# EAGLE board OSPLv2_4_5 (EAGLE 6.6.0)
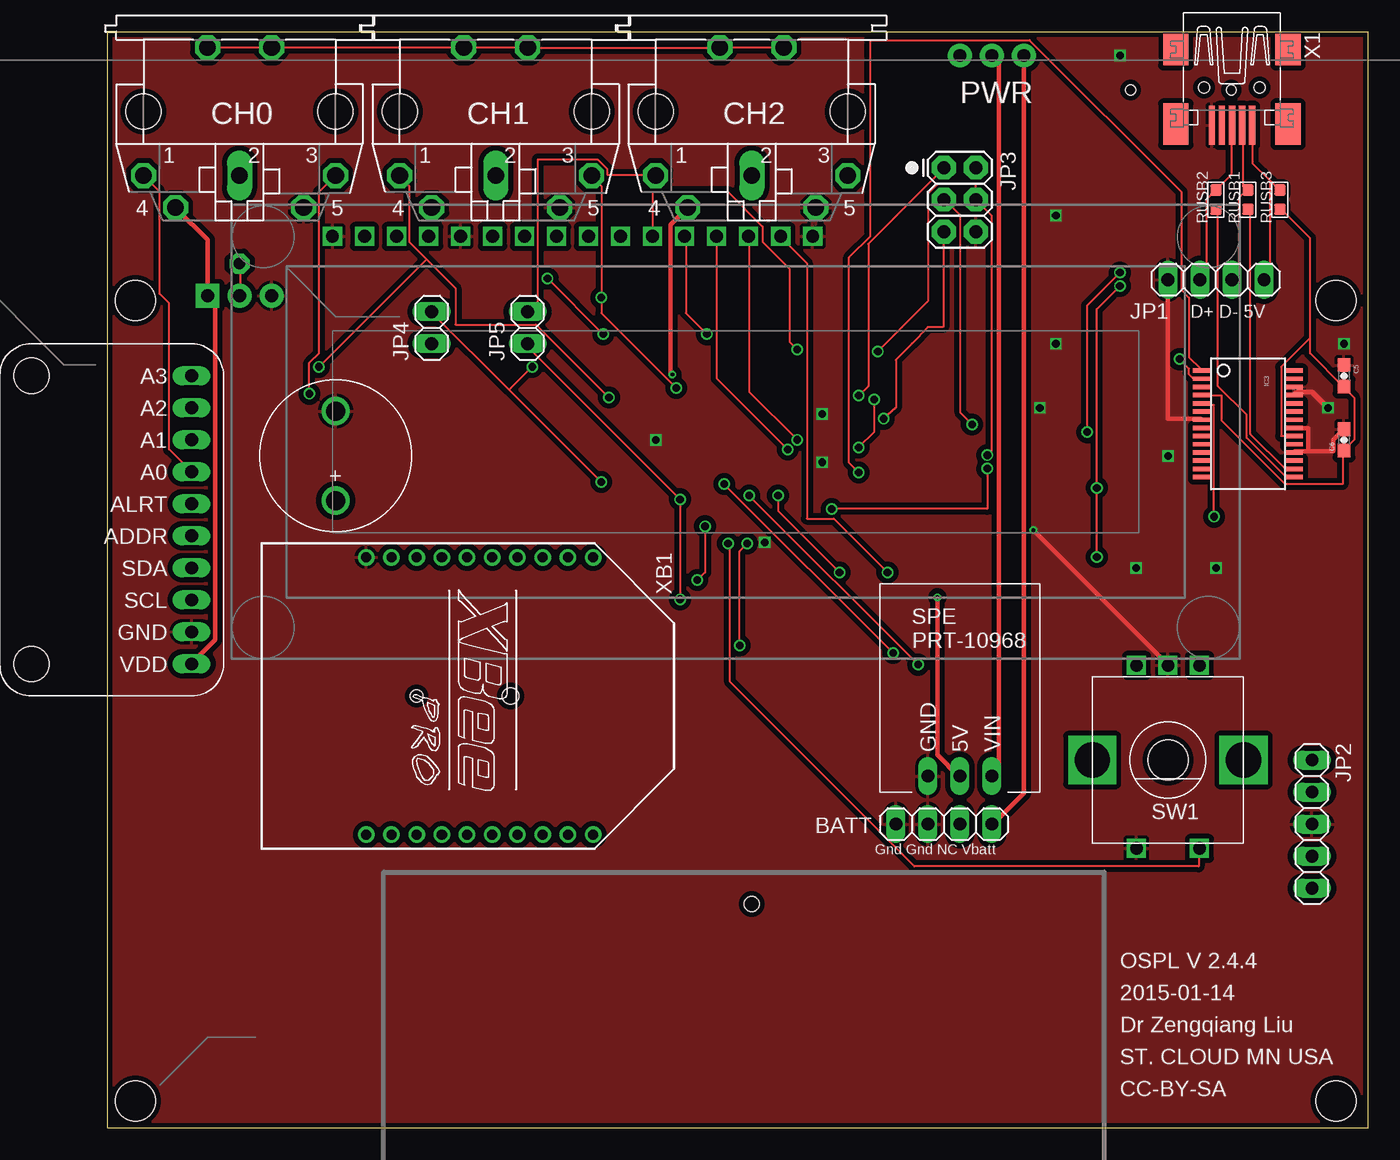
[diagram p0: board, top side]
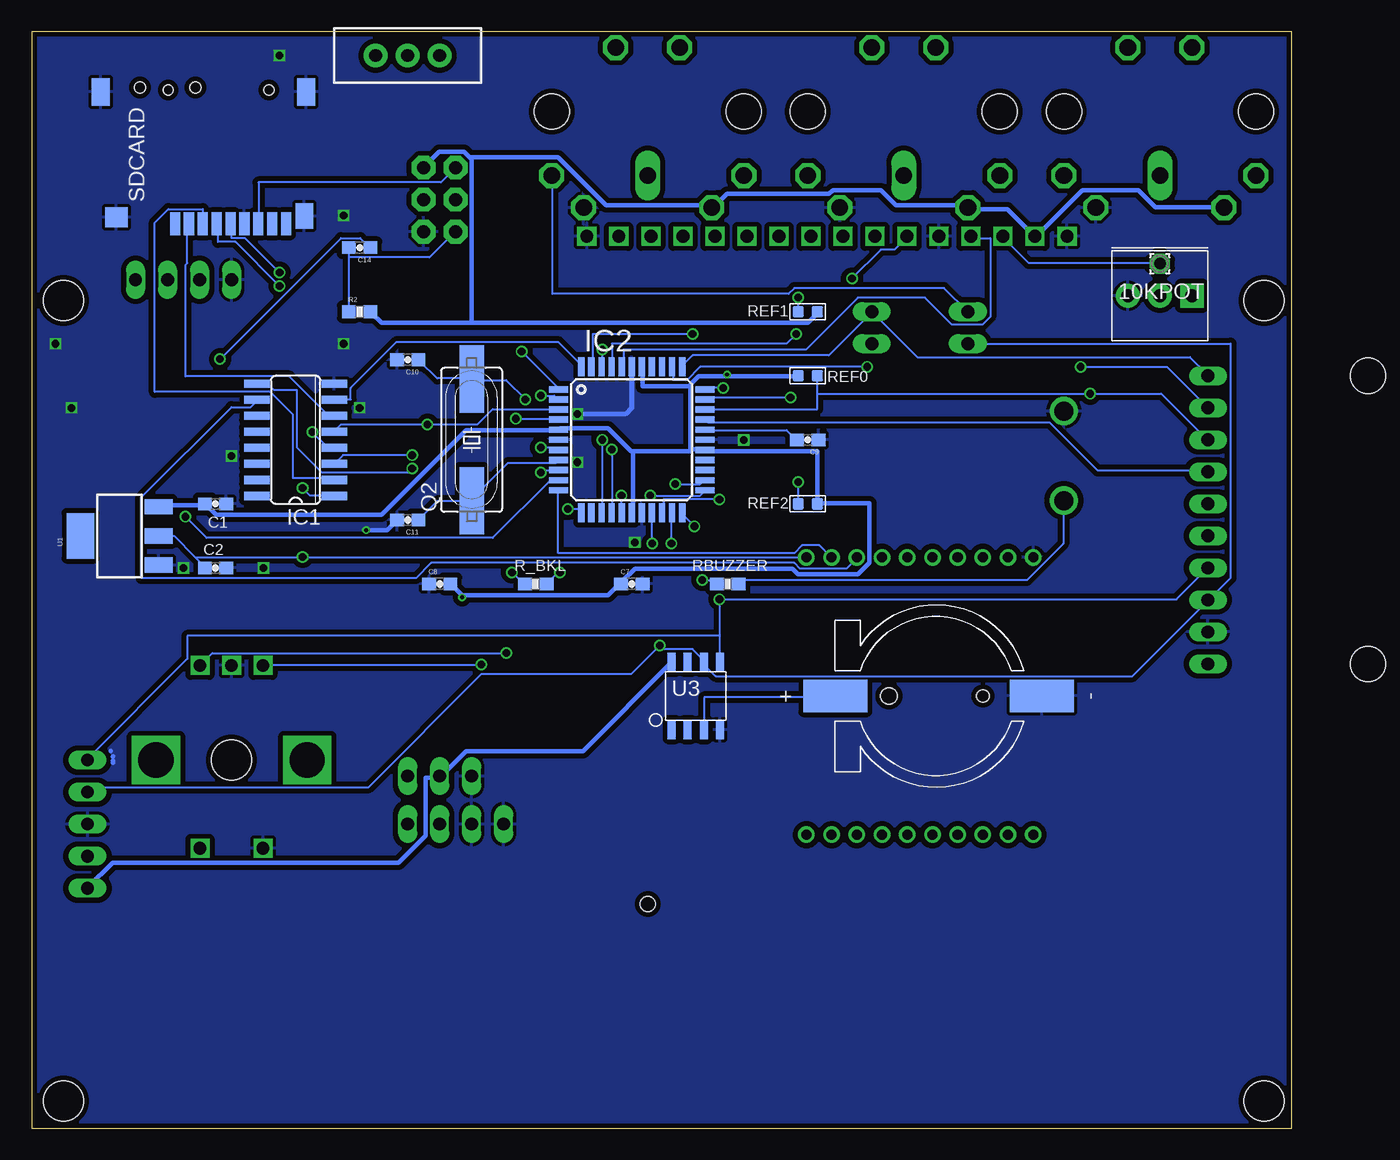
[diagram p1: board, bottom side, seen from below]

Size 100 x 87 mm. Coordinates in mm from the lower left corner, seen from the top.
Outline: 0,0 0,87 100,87 100,0 0,0
Copper layers (1*16): Top 0.035mm / dielectric 1.5mm / Bottom 0.035mm
Design rules "Fusion_eagle_rule_v1.1": minimum track width 6mil, minimum drill 12mil, track to track 6mil, track to pad 6mil, pad to pad 6mil, via to via 6mil, smd to smd 0mil, copper to edge 10mil, drill to drill 10mil, minimum pad ring 10mil, minimum via ring 6mil, stop-mask expansion 2mil, vias tented up to drill 100mil, thermal gap 10mil
Net classes: 0 default: width 0.152 mm, drill 0.61 mm, clearance 0.152 mm; 1 power: width 0.356 mm
Holes 3.2 mm at 84.12,29.21
Holes 1.2 mm at 51.1,17.78

## Footprints (pad centres in the part's own frame; a part is rotated, then mirrored left to right if it is on the bottom)
1,6/0,9 = drill 0.914 pad 1.6 octagon: 1 0,0
HARWIN12MMHOLDER = smd 2.54 x 5.08: PAD3V3 0,-7.975; PADGND 0,8.425 | hole 1: 0,3.725 | hole 1.3: 0,-3.725
1X04 = drill 1.016 long: 1 -3.81,0; 2 -1.27,0; 3 1.27,0; 4 3.81,0
BUZZER-6P5-7P5 = drill 1.5: P$1 0,3.55; P$2 0,-3.55
0603-CAP = smd 1.1 x 1: 1 -0.85,0; 2 0.85,0
MAB5SH = drill 1.321 octagon: 1 7.62,5.08; 3 -7.62,5.08; 4 5.08,7.62; 5 -5.08,7.62; PE -2.54,-5.08; PE@ 2.54,-5.08 | drill 1.321 long: 2 0,5.08 | hole 2.794: 7.62,0; -7.62,0
SO16 = smd 0.66 x 2.032: 1 -4.445,-3.073; 2 -3.175,-3.073; 3 -1.905,-3.073; 4 -0.635,-3.073; 5 0.635,-3.073; 6 1.905,-3.073; 7 3.175,-3.073; 8 4.445,-3.073; 9 4.445,3.073; 10 3.175,3.073; 11 1.905,3.073; 12 0.635,3.073; 13 -0.635,3.073; 14 -1.905,3.073; 15 -3.175,3.073; 16 -4.445,3.073
TQFP44 = smd 1.5 x 0.5: 1 -5.8,4; 2 -5.8,3.2; 3 -5.8,2.4; 4 -5.8,1.6; 5 -5.8,0.8; 6 -5.8,0; 7 -5.8,-0.8; 8 -5.8,-1.6; 9 -5.8,-2.4; 10 -5.8,-3.2; 11 -5.8,-4; 23 5.8,-4; 24 5.8,-3.2; 25 5.8,-2.4; 26 5.8,-1.6; 27 5.8,-0.8; 28 5.8,0; 29 5.8,0.8; 30 5.8,1.6; 31 5.8,2.4; 32 5.8,3.2; 33 5.8,4 | smd 0.5 x 1.5: 12 -4,-5.8; 13 -3.2,-5.8; 14 -2.4,-5.8; 15 -1.6,-5.8; 16 -0.8,-5.8; 17 0,-5.8; 18 0.8,-5.8; 19 1.6,-5.8; 20 2.4,-5.8; 21 3.2,-5.8; 22 4,-5.8; 34 4,5.8; 35 3.2,5.8; 36 2.4,5.8; 37 1.6,5.8; 38 0.8,5.8; 39 0,5.8; 40 -0.8,5.8; 41 -1.6,5.8; 42 -2.4,5.8; 43 -3.2,5.8; 44 -4,5.8
SSOP28DB = smd 0.348 x 1.397: 1 -4.225,-3.656; 2 -3.575,-3.656; 3 -2.925,-3.656; 4 -2.275,-3.656; 5 -1.625,-3.656; 6 -0.975,-3.656; 7 -0.325,-3.656; 8 0.325,-3.656; 9 0.975,-3.656; 10 1.625,-3.656; 11 2.275,-3.656; 12 2.925,-3.656; 13 3.575,-3.656; 14 4.225,-3.656; 15 4.225,3.656; 16 3.575,3.656; 17 2.925,3.656; 18 2.275,3.656; 19 1.625,3.656; 20 0.975,3.656; 21 0.325,3.656; 22 -0.325,3.656; 23 -0.975,3.656; 24 -1.625,3.656; 25 -2.275,3.656; 26 -2.925,3.656; 27 -3.575,3.656; 28 -4.225,3.656
1X05 = drill 1.016 long: 1 -5.08,0; 2 -2.54,0; 3 0,0; 4 2.54,0; 5 5.08,0
2X3 = drill 1.016 pad 1.88 octagon: 1 0,0; 2 0,2.54; 3 2.54,0; 4 2.54,2.54; 5 5.08,0; 6 5.08,2.54
1X02 = drill 1.016 long: 1 -1.27,0; 2 1.27,0
LCD-16X2-0HOLES-NO-FRAME = drill 1.016 square: A 3.56,15.5; DB0 -16.76,15.5; DB1 -14.22,15.5; DB2 -11.68,15.5; DB3 -9.14,15.5; DB4 -6.6,15.5; DB5 -4.06,15.5; DB6 -1.52,15.5; DB7 1.02,15.5; E -19.3,15.5; K 6.1,15.5; R/W -21.84,15.5; RS -24.38,15.5; VDD -29.46,15.5; VO -26.92,15.5; VSS -32,15.5
3362U = drill 1.016 pad 1.88 square: P$1 0,2.54 | drill 1.016 pad 1.88: P$2 2.54,2.54; P$3 5.08,2.54
SWITCH-SPDT = drill 1.016 pad 1.88: 1 0,2.54; 2 0,0; 3 0,-2.54
HC49UP = smd 5.334 x 1.93: 1 -4.826,0; 2 4.826,0
0603-RES = smd 1.1 x 1: 1 -0.85,0; 2 0.85,0
R0603 = smd 0.889 x 0.889: 1 -0.762,0; 2 0.762,0
MICROSD_PP = smd 1.8 x 0.8: 1 0,3.85; 2 0,2.75; 3 0,1.65; 4 0,0.55; 5 0,-0.55; 6 0,-1.65; 7 0,-2.75; 8 0,-3.85; 9 0,-4.95 | smd 1.6 x 1.8: GND@1 0.5,8.5 | smd 2.2 x 1.4: GND@2 10.45,9.75; GND@4 10.45,-6.55 | smd 2 x 1.4: GND@3 0.6,-6.4 | hole 0.8: 10.6,4.4; 10.6,-3.6
SPE-DC-DC-BOOST = drill 1.016 long: GND -2.54,-6.35; VIN 2.54,-6.35; VOUT 0,-6.35
SWITCH-ALPS_ALPS_EC12E_SW = drill 1 square: A -2.5,-7.5; B 2.5,-7.5; C 0,-7.5; D -2.5,7; E 2.5,7 | drill 2.8 square: GND1 -6,0; GND2 6,0
SOT223 = smd 1.219 x 2.235: 1 -2.311,-3.099; 2 0,-3.099; 3 2.311,-3.099 | smd 3.6 x 2.2: 4 0,3.099
SOP08 = smd 0.635 x 1.524: 1 -1.905,-2.667; 2 -0.635,-2.667; 3 0.635,-2.667; 4 1.905,-2.667; 5 1.905,2.667; 6 0.635,2.667; 7 -0.635,2.667; 8 -1.905,2.667
BUSHING-AG-54 = hole 3.2: -47.625,-31.75; 47.625,-31.75; -47.625,31.75; 47.625,31.75
ADAFRUIT-ADC = drill 1.016 long: A0 3.81,0; A1 6.35,0; A2 8.89,0; A3 11.43,0; ADDR -1.27,0; ALRT 1.27,0; GND -8.89,0; SCL -6.35,0; SDA -3.81,0; VDD -11.43,0 | hole 2.8: -11.43,12.7; 11.43,12.7
32005-301 = smd 3.1 x 0.5: 1 3,1.6; 2 3,0.8; 3 3,0; 4 3,-0.8; 5 3,-1.6 | smd 2.5 x 2: M1 -3,-4.45; M2 -3,4.45 | smd 3.3 x 2: M3 2.9,4.45; M4 2.9,-4.45 | hole 0.9: 0,2.2; 0,-2.2
XBEE-PRO = drill 0.8 pad 1.27: 1 -11,9; 2 -11,7; 3 -11,5; 4 -11,3; 5 -11,1; 6 -11,-1; 7 -11,-3; 8 -11,-5; 9 -11,-7; 10 -11,-9; 11 11,-9; 12 11,-7; 13 11,-5; 14 11,-3; 15 11,-1; 16 11,1; 17 11,3; 18 11,5; 19 11,7; 20 11,9

## Placement (x,y rotation side)
10KPOT  wiper  [1,6/0,9]  10.46,68.58 180 bottom
BAT1  [HARWIN12MMHOLDER]  28.24,34.29 270 bottom
BATT  [1X04]  66.34,24.13 0 top
BUZZER  DIPMICRO-BUZZER6P5_7P5  [BUZZER-6P5-7P5]  18.08,53.34 180 top
C1  10uF  [0603-CAP]  85.39,49.53 180 bottom
C2  10uF  [0603-CAP]  85.39,44.45 180 bottom
C5  0.1uF  [0603-CAP]  98.09,59.69 270 top
C6  10uF  [0603-CAP]  98.09,54.61 90 top
C7  0.1uF  [0603-CAP]  52.37,43.18 0 bottom
C8  0.1uF  [0603-CAP]  67.61,43.18 0 bottom
C9  0.1uF  [0603-CAP]  38.4,54.61 180 bottom
C10  22pF  [0603-CAP]  70.15,60.96 180 bottom
C11  22pF  [0603-CAP]  70.15,48.26 180 bottom
C14  0.1uF  [0603-CAP]  73.96,69.85 180 bottom
CH0  MAB5SH  [MAB5SH]  10.46,80.65 180 top
CH1  MAB5SH  [MAB5SH]  30.78,80.65 180 top
CH2  MAB5SH  [MAB5SH]  51.1,80.65 180 top
IC1  74HC4050D  [SO16]  79.04,54.61 90 bottom
IC2  ATMEGA1284P-AU  [TQFP44]  52.37,54.61 0 bottom
IC3  FT232RLSSOP  [SSOP28DB]  90.47,55.88 270 top
JP1  USB  [1X04]  87.93,67.31 180 top
JP2  11DOF  [1X05]  95.55,24.13 270 top
JP3  ICSP  [2X3]  66.34,76.2 270 top
JP4  SCL  [1X02]  25.7,63.5 90 top
JP5  SDA  [1X02]  33.32,63.5 90 top
LCD  LCD-HD447804-HOLES4-HOLES  [LCD-16X2-0HOLES-NO-FRAME]  49.83,55.25 0 top
POT1  10K  [3362U]  7.92,68.58 180 bottom
PWR  [SWITCH-SPDT]  70.15,85.09 270 bottom
Q2  [HC49UP]  65.07,54.61 90 bottom
R2  10K  [0603-RES]  73.96,64.77 0 bottom
R_BKL  330  [0603-RES]  59.99,43.18 180 bottom
RBUZZER  330  [0603-RES]  44.75,43.18 180 bottom
REF0  10k  [R0603]  38.4,59.69 0 bottom
REF1  10k  [R0603]  38.4,64.77 180 bottom
REF2  10k  [R0603]  38.4,49.53 180 bottom
RUSB1  22  [R0603]  90.47,73.66 90 top
RUSB2  22  [R0603]  87.93,73.66 90 top
RUSB3  0  [R0603]  93.01,73.66 90 top
SDCARD  MICROSD_PP  [MICROSD_PP]  84.76,71.75 90 bottom
SPEDC-DC  DC-DCBOOSTSPE-DC-DCBOOSTSPE-DC-DC-BOOST  [SPE-DC-DC-BOOST]  67.61,34.29 0 top
SW1  SWITCH-ALPS_EC12E_SW  [SWITCH-ALPS_ALPS_EC12E_SW]  84.12,29.21 180 top
U1  ASM1117-3.3  [SOT223]  93.01,46.99 90 bottom
U3  DS1307_SOP08  [SOP08]  47.29,34.29 0 bottom
U$1  ENCLOSUREAG-54  [BUSHING-AG-54]  49.83,33.91 0 top
U$2  ADAFRUIT-ADCADS11X5ADS11X5  [ADAFRUIT-ADC]  6.65,48.26 90 top
X1  MINI-USB-32005-301  [32005-301]  89.2,82.55 270 top
XB1  XBEE-PRO  [XBEE-PRO]  29.51,34.29 270 top

## Library data of the parts
10KPOT = wirepad
BAT1 BATT BUZZER LCD SPEDC-DC U$1 U$2 = ICs
C1 C2 C5-C11 C14 IC3 JP3 POT1 PWR R2 R_BKL RBUZZER = SparkFun
CH0 CH1 CH2 = con-hirschmann; OC_FARNELL: 809883; OC_NEWARK: unknown
IC1 = 40xx
IC2 = atmel; MPN: ATMEGA644PV-10AU; OC_FARNELL: 1455123; OC_NEWARK: 58M3748
JP1 JP2 JP4 JP5 = pinhead
Q2 = crystal; OC_FARNELL: unknown; OC_NEWARK: unknown
REF0 REF1 REF2 RUSB1-RUSB3 = OPL Eagle Library
SDCARD = DE1594-v2
SW1 = ICs; MPN: EC12E2424407; OC_FARNELL: 1520813; OC_NEWARK: 74M1068
U1 U3 = Itead_IC_110429
X1 = con-cypressindustries; OC_FARNELL: unknown; OC_NEWARK: unknown
XB1 = maxstream; MPN: XBP24-AWI-001; OC_FARNELL: 1337916; OC_NEWARK: 42M2667

## Nets
3V3: C2.2 IC1.1 SDCARD.4 U1.2 XB1.1
A0: CH0.1 IC2.30 U$2.A0
A1: CH0.3 IC2.31 REF0.2 U$2.A1
A2: CH1.1 IC2.32 U$2.A2
A3: CH1.3 IC2.33 REF1.2
A4: CH2.1 IC2.34 JP5.2 U$2.A3
A5: CH2.3 IC2.35 JP4.2 REF2.2
A6: IC2.36
A7: IC2.37
AREF1: C9.2 IC2.29
CS3: IC1.6 SDCARD.2
D4: IC2.40 LCD.RS
D5: IC2.41 LCD.E
D6: IC2.42 LCD.DB4
D7: IC2.43 LCD.DB5
D8: IC2.14 LCD.DB7
D9: IC2.15 LCD.DB6
D10: IC1.7 IC2.44
D24: IC2.21 SW1.D
D25: IC2.22 RBUZZER.2
D26: IC2.23 SW1.B
D27: IC2.24 SW1.A
D28: IC2.25
D29: IC2.26
D30: IC2.13
D31: IC2.16 R_BKL.1
D+: JP1.3 RUSB2.2 X1.3
D-: JP1.2 RUSB1.2 X1.2
DI3: IC1.2 SDCARD.3
DTR: C14.1 IC3.2
GND [power]: BAT1.PADGND BATT.1 BATT.2 BUZZER.P$2 C1.1 C2.1 C5.1 C6.2 C7.2 C8.1 C9.1 C10.2 C11.2 CH0.5 CH1.5 CH2.5 IC1.8 IC2.6 IC2.18 IC2.28 IC2.39 IC3.7 IC3.18 IC3.21 IC3.25 IC3.26 JP1.4 JP2.3 JP3.6 LCD.K LCD.R/W LCD.VSS POT1.P$3 SDCARD.6 SDCARD.GND@1 SDCARD.GND@2 SDCARD.GND@3 SDCARD.GND@4 SPEDC-DC.GND SW1.C SW1.E U1.1 U3.4 U$2.GND X1.5 XB1.10
ID: X1.4
MISO: IC2.2 JP3.1 SDCARD.7
MOSI: IC1.3 IC2.1 JP3.4
N$1: C11.1 IC2.8 Q2.1
N$2: C10.1 IC2.7 Q2.2
N$4: LCD.A R_BKL.2
N$5 [power]: BATT.4 PWR.3
N$6: BAT1.PAD3V3 U3.3
N$7: 10KPOT.1 LCD.VO POT1.P$2
N$13: IC1.11
N$14: IC1.12
N$15: IC1.14
N$23: IC1.15
N$24: BUZZER.P$1 RBUZZER.1
PE: CH0.PE CH0.PE@ CH1.PE CH1.PE@ CH2.PE CH2.PE@
RD+: IC3.15 RUSB2.1
RD-: IC3.16 RUSB1.1
RESET: C14.2 IC2.4 JP3.5 R2.1
RX1: IC2.11 XB1.2
RX3: IC1.10 XB1.3
RX-I: IC2.9 IC3.1
SCK: IC1.5 IC2.3 JP3.3
SCK3: IC1.4 SDCARD.5
SCL: IC2.19 JP2.2 JP4.1 U3.6 U$2.SCL
SDA: IC2.20 JP2.1 JP5.1 U3.5 U$2.SDA
TX1: IC1.9 IC2.12
TX-O: IC2.10 IC3.5
VBUS: JP1.1 RUSB3.2 X1.1
VCC [power]: C1.2 C7.1 C8.2 CH0.4 CH1.4 CH2.4 IC2.5 IC2.17 IC2.27 IC2.38 JP2.5 JP3.2 LCD.VDD POT1.P$1 R2.2 REF0.1 REF1.1 REF2.1 SPEDC-DC.VOUT U1.3 U3.8 U$2.VDD
VIN [power]: PWR.2 SPEDC-DC.VIN
VUSB: C5.2 C6.1 IC3.4 IC3.20 RUSB3.1

## Tracks (layer width: path | path; a pad name or v marks a point on that pad's centre or on a via)
3V3  (via drill 0.61)
  Top 0.152: v80.31,66.8 78.49,64.97 v78.49,50.8 v78.49,45.31
  Bottom 0.152: v80.31,66.8 83.82,70.31 85.19,70.31 85.19,71.68 SDCARD.4 | v78.49,50.8 77.88,50.19 76.05,50.19 IC1.1 | 87.02,45.31 88.7,46.99 U1.2 | 87.02,45.31 86.26,44.55 C2.2 | 87.02,45.31 v78.49,45.31 38.56,45.31 XB1.1
A0
  Top 0.152: U$2.A0 4.88,53.85 4.88,65.43 4.11,66.19 4.11,74.27 2.9,75.49 CH0.1
  Bottom 0.152: IC2.30 46.48,56.13 46.33,55.98 19.2,55.98 15.39,52.17 6.71,52.17 U$2.A0
A1  (via drill 0.61)
  Top 0.152: v16,58.27 16,60.71 16.76,61.47 16.76,74.27 17.98,75.49 CH0.3
  Bottom 0.152: 37.64,58.27 37.64,57.05 46.48,57.05 IC2.31 | 37.64,58.27 REF0.2 | 37.64,58.27 v16,58.27 10.36,58.27 6.71,54.61 U$2.A1
A2  (via drill 0.61)
  Top 0.152: v39.78,57.96 33.98,63.75 27.58,63.75 27.58,66.65 25.3,68.94 | 25.3,68.94 23.93,70.31 23.93,74.73 23.16,75.49 CH1.1 | 25.3,68.94 v16.76,60.4
  Bottom 0.152: v39.78,57.96 46.33,57.96 46.48,57.81 IC2.32 | U$2.A2 9.91,60.4 v16.76,60.4
A3  (via drill 0.61)
  Top 0.152: CH1.3 38.4,75.49 39.17,74.73 v39.17,65.89 39.17,64.67 v45.11,58.73
  Bottom 0.152: v39.17,65.89 REF1.2 | v45.11,58.73 46.48,58.73 IC2.33
A4
  Top 0.152: JP5.2 34.14,65.58 34.14,76.86 38.86,76.86 39.62,76.1 39.62,75.64 43.43,75.64 CH2.1
  Bottom 0.152: IC2.34 48.31,60.55 47.55,61.32 36.73,61.32 33.38,64.67 JP5.2 29.72,61.16 8.08,61.16 6.71,59.79 U$2.A3
A5  (via drill 0.61)
  Top 0.152: 31.85,58.57 25.76,64.67 JP4.2 | 31.85,58.57 v39.17,51.26 | 31.85,58.57 v33.68,60.4
  Bottom 0.152: v39.17,51.26 REF2.2 | v33.68,60.4 46.94,60.4 48.01,59.33 49.07,59.33 49.07,60.4 IC2.35 | JP4.2 27.58,66.65 39.47,66.65 39.93,66.19 58.67,66.19 58.67,75.49 CH2.3
AREF1
  Bottom 0.152: C9.2 39.32,54.61 40.08,55.37 46.48,55.37 IC2.29
CS3
  Bottom 0.152: SDCARD.2 87.63,71.68 87.63,68.63 87.78,68.48 87.78,59.64 79.55,59.64 76.5,56.59 76.05,56.59 IC1.6
D4
  Bottom 0.152: IC2.40 53.03,60.55 53.03,61.77 38.56,61.77 34.44,65.89 29.11,65.89 26.97,63.75 24.54,63.75 23.93,64.36 23.93,70.61 25.45,70.61 LCD.RS
D5  (via drill 0.61)
  Top 0.152: v34.9,67.41 v39.32,62.99
  Bottom 0.152: v39.32,62.99 40.08,62.23 53.95,62.23 53.95,60.55 IC2.41 | v34.9,67.41 32.61,69.7 31.55,69.7 30.63,70.61 LCD.E
D6  (via drill 0.61)
  Top 0.152: v54.71,61.77 54.1,62.38 54.1,68.17 51.97,70.31 51.97,71.53 49.22,74.27 43.28,74.27 43.28,70.76 LCD.DB4
  Bottom 0.152: v54.71,61.77 54.71,60.55 IC2.42
D7  (via drill 0.61)
  Top 0.152: v47.55,62.99 45.87,64.67 45.87,70.61 LCD.DB5
  Bottom 0.152: v47.55,62.99 55.47,62.99 55.47,60.55 IC2.43
D8  (via drill 0.61)
  Top 0.152: v54.71,54.61 50.9,58.42 50.9,70.61 LCD.DB7
  Bottom 0.152: v54.71,54.61 54.71,48.82 IC2.14
D9  (via drill 0.61)
  Top 0.152: v53.95,53.85 48.31,59.49 48.31,70.61 LCD.DB6
  Bottom 0.152: v53.95,53.85 53.95,48.82 IC2.15
D10
  Bottom 0.152: IC2.44 56.39,60.55 58.22,62.38 71.02,62.38 74.68,58.73 74.68,57.81 75.89,57.81 IC1.7
D24  (via drill 0.61)
  Top 0.152: v49.22,46.38 49.38,46.23 49.38,35.41 64.01,20.78 86.56,20.78 86.56,22.15 SW1.D
  Bottom 0.152: v49.22,46.38 49.22,48.67 IC2.21
D25  (via drill 0.61)
  Top 0.152: v46.79,43.48 47.4,44.09 v47.4,47.75
  Bottom 0.152: v46.79,43.48 46.02,43.48 45.72,43.18 RBUZZER.2 | v47.4,47.75 48.31,48.67 IC2.22
D26  (via drill 0.61)
  Top 0.152: v64.31,36.78 v50.9,50.19
  Bottom 0.152: v50.9,50.19 46.94,50.19 46.63,50.5 IC2.23 | v64.31,36.78 81.53,36.78 SW1.B
D27  (via drill 0.61)
  Top 0.152: v62.33,37.69 v48.92,51.11
  Bottom 0.152: v48.92,51.11 46.94,51.11 46.63,51.41 IC2.24 | v62.33,37.69 85.65,37.69 86.56,36.78 SW1.A
D31  (via drill 0.61)
  Top 0.152: v58.06,44.09 53.19,48.97 v53.19,50.19
  Bottom 0.152: v58.06,44.09 58.22,44.09 59.13,43.18 R_BKL.1 | v53.19,50.19 53.19,48.82 IC2.16
D+
  Top 0.152: X1.3 89.15,79.45 89.15,75.64 RUSB2.2 87.17,73.66 87.17,67.87 86.72,67.41 JP1.3
D-
  Top 0.152: 90.37,74.42 90.07,74.73 90.07,79.45 X1.2 | JP1.2 89.76,67.87 89.76,73.81 90.37,74.42 | 90.37,74.42 RUSB1.2
DI3
  Bottom 0.152: SDCARD.3 86.41,71.83 86.41,72.9 89.15,72.9 90.22,71.83 90.22,58.42 81.08,58.42 79.25,56.59 79.25,51.56 76.05,51.56 IC1.2
DTR  (via drill 0.61)
  Top 0.152: v85.04,61.01 85.8,60.25 85.8,59.79 86.11,59.49 86.72,59.49 IC3.2
  Bottom 0.152: v85.04,61.01 75.44,70.61 73.91,70.61 73.15,69.85 C14.1
GND  (via drill 0.3, 0.6)
  Top 0.356: 95.25,53.7 97.23,53.7 97.23,54.61 97.99,55.37 C6.2 | 95.25,53.7 94.18,53.7 IC3.18 | 95.25,53.7 95.25,55.52 94.18,55.52 IC3.21 | JP1.4 84.12,56.29 86.72,56.29 IC3.7 | 56.24,72.9 CH2.5 | 56.24,72.9 | v73.46,47.45 84.12,36.78 SW1.C | C5.1 98.15,60.55 98.22,60.55
  Top 0.406: IC3.25 94.4,58.42 95.55,58.42 v96.82,57.15
  Bottom 0.356: v73.46,47.45 71.78,47.45 71.02,48.21 C11.2 | 93.57,29.01 93.5,29.01 | 93.57,29.16 93.5,29.16 | 93.57,29.46 93.51,29.49 | 93.73,29.92 93.7,29.95
  Bottom 0.406: IC2.39 52.37,57.15 52.88,56.64 56.44,56.64
  other vias: 56.69,56.64 43.48,54.61 56.69,52.83 87.93,44.45 73.96,57.15 75.23,62.23 98.09,62.23 75.23,72.39 80.31,85.09 84.12,53.34 81.58,44.45 52.12,46.48
  pour Bottom (isolate 0.406): -2.24,-1.27 -2.24,88.9 103.57,88.9 103.57,-1.27
  pour Top (isolate 0.406): -0.97,90.17 101.9,90.17 101.9,-3.81 -0.97,-3.81
MISO  (via drill 0.61)
  Top 0.152: v59.59,58.11 60.35,58.88 60.35,70.16 66.29,76.1 JP3.1
  Bottom 0.152: v59.59,58.11 58.52,58.11 58.22,57.81 IC2.2 | JP3.1 67.51,75.03 81.99,75.03 81.99,71.83 SDCARD.7
MOSI  (via drill 0.61)
  Top 0.152: v61.11,61.62 65.07,65.58 65.07,74.12 65.84,74.88 68.88,74.88 JP3.4 70.1,72.44 70.1,53.7 v69.8,53.39
  Bottom 0.152: v61.11,61.62 58.22,58.73 IC2.1 | IC1.3 75.29,53.39 v69.8,53.39
N$1
  Bottom 0.152: C11.1 69.19,48.36 67.82,49.73 65.07,49.73 Q2.1 65.07,49.89 62.18,52.78 58.37,52.78 58.22,52.93 IC2.8
N$2  (via drill 0.61)
  Top 0.152: v59.59,54 60.81,55.22 v60.81,57.81
  Bottom 0.152: C10.1 69.19,60.86 67.82,59.49 65.07,59.49 Q2.2 65.07,59.33 62.33,59.33 v60.81,57.81 | v59.59,54 58.37,54 58.22,53.85 IC2.7
N$4  (via drill 0.61)
  Top 0.152: v61.87,44.09 57.61,48.36 55.47,48.36 55.47,68.63 53.49,70.61 LCD.A
  Bottom 0.152: v61.87,44.09 60.96,43.18 R_BKL.2
N$5
  Top 0.356: PWR.3 72.69,26.57 70.26,24.13 BATT.4
N$6
  Bottom 0.152: U3.3 46.63,31.75 46.63,34.19 36.27,34.19 BAT1.PAD3V3
N$7
  Top 0.152: POT1.P$2 10.52,66.04 10.52,68.48 10KPOT.1
  Bottom 0.152: LCD.VO 22.86,70.61 20.88,68.63 10.52,68.63 10KPOT.1
N$24
  Bottom 0.152: RBUZZER.1 43.89,43.18 43.59,43.48 21.03,43.48 18.14,46.38 18.14,49.73 BUZZER.P$1
PE
  Top 0.152: CH2.PE 53.64,85.7 48.62,85.7 CH2.PE@ 48.46,85.7 33.38,85.7 CH1.PE 33.22,85.7 28.35,85.7 CH1.PE@ 28.19,85.7 13.11,85.7 CH0.PE 12.95,85.7 7.92,85.7 CH0.PE@
RD+
  Top 0.152: RUSB2.1 88.09,72.75 88.09,58.88 90.37,56.59 90.37,54.76 93.42,51.71 94.03,51.71 IC3.15
RD-
  Top 0.152: RUSB1.1 90.53,72.9 90.68,72.75 90.68,55.07 93.42,52.32 94.03,52.32 IC3.16
RESET  (via drill 0.61)
  Top 0.152: v61.57,56.29 62.53,57.15 62.53,60.96 63.8,62.23 65.07,63.55 66.29,63.55 66.29,71.07 JP3.5
  Bottom 0.152: 74.83,69.09 74.83,69.85 C14.2 | 74.83,69.09 74.83,64.82 R2.1 | v61.57,56.29 58.22,56.29 IC2.4 | 74.83,69.09 68.43,69.09 66.45,71.07 JP3.5
RX1
  Bottom 0.152: IC2.11 58.22,50.5 58.22,45.62 39.47,45.62 38.86,46.23 37.49,46.23 36.58,45.31 XB1.2
RX3
  Bottom 0.152: IC1.10 82.14,57.66 82.6,57.2 84.12,57.2 91.29,50.04 91.29,43.64 69.49,43.64 68.27,44.86 39.47,44.86 39.01,44.4 35.36,44.4 34.59,45.16 XB1.3
RX-I  (via drill 0.61)
  Top 0.152: v59.59,52.02 58.83,52.78 58.83,69.09 60.5,70.76 60.5,86.31 73.15,86.31 85.19,74.27 85.19,66.5 85.8,65.89 85.8,61.16 86.72,60.25 IC3.1
  Bottom 0.152: v59.59,52.02 59.44,52.17 58.22,52.17 IC2.9
SCK  (via drill 0.61)
  Top 0.152: v68.58,55.83 67.67,56.74 67.67,72.44 66.45,73.66 JP3.3
  Bottom 0.152: IC2.3 58.22,57.05 63.4,57.05 64.62,55.83 v68.58,55.83 75.44,55.83 75.89,55.37 IC1.5
SCK3  (via drill 0.61)
  Top 0.152: v80.31,67.87 77.72,65.28 v77.72,55.22
  Bottom 0.152: v80.31,67.87 83.06,70.61 84.12,70.61 84.12,71.68 SDCARD.5 | v77.72,55.22 76.5,54 76.05,54 IC1.4
SCL  (via drill 0.61)
  Top 0.152: v50.75,46.38 50.14,45.77 v50.14,38.3
  Bottom 0.152: JP4.1 4.88,62.23 4.88,43.64 6.55,41.96 U$2.SCL 6.71,41.81 12.65,35.87 45.72,35.87 46.79,36.93 U3.6 46.63,37.08 47.55,38 49.83,38 v50.14,38.3 52.43,36.02 64.31,36.02 73.3,27.03 95.25,27.03 95.55,26.72 JP2.2 | v50.75,46.38 50.75,48.67 IC2.19
SDA  (via drill 0.61)
  Top 0.152: JP5.1 33.38,62.23 33.38,61.92 v45.41,49.89 v45.41,41.96
  Bottom 0.152: v45.41,49.89 49.83,49.89 49.83,48.82 IC2.20 | 45.41,39.06 v45.41,41.96 9.14,41.96 U$2.SDA | 45.41,39.06 45.41,37.08 U3.5 | 45.41,39.06 87.63,39.06 87.63,37.24 95.55,29.31 JP2.1
TX1  (via drill 0.61)
  Top 0.152: v57.45,49.12 69.8,49.12 v69.8,52.32
  Bottom 0.152: v57.45,49.12 56.69,49.12 56.39,48.82 IC2.12 | v69.8,52.32 70.1,52.02 76.96,52.02 78.94,54 78.94,58.57 80.77,58.57 81.23,59.03 81.99,59.03 IC1.9
TX-O  (via drill 0.61)
  Top 0.152: v87.78,48.51 87.78,57.35 86.87,57.35 IC3.5
  Bottom 0.152: v87.78,48.51 86.11,46.84 63.4,46.84 58.83,51.41 58.22,51.41 IC2.10
VBUS
  Top 0.152: 92.2,75.18 90.83,76.56 90.83,79.45 X1.1 | 92.2,75.18 92.96,74.42 RUSB3.2 | 92.2,75.18 92.2,67.87 91.74,67.41 JP1.1
VCC  (via drill 0.3)
  Top 0.356: v65.84,42.11 65.84,29.62 67.51,27.94 SPEDC-DC.VOUT | U$2.VDD 6.71,36.93 8.53,38.76 8.53,65.43 POT1.P$1 7.92,70.46 5.49,72.9 CH0.4 | v44.81,59.79 44.65,59.94 44.65,71.68 46.02,73.05 CH2.4
  Bottom 0.356: U3.8 56.24,29.92 65.53,29.92 67.51,27.94 SPEDC-DC.VOUT 67.67,27.79 68.73,27.79 68.73,23.22 70.87,21.08 93.57,21.08 95.55,19.1 JP2.5 | 65.84,42.27 54.25,42.27 53.34,43.18 C7.1 53.19,43.33 52.12,44.4 39.62,44.4 39.17,43.94 34.44,43.94 33.53,44.86 33.53,49.58 37.49,49.58 REF2.1 37.64,53.7 46.48,53.7 IC2.27 46.63,53.85 47.7,53.85 | 65.84,42.27 66.75,43.18 C8.2 | U1.3 89.92,49.43 86.26,49.43 C1.2 86.11,49.43 85.34,48.67 72.24,48.67 65.53,55.37 58.37,55.37 IC2.5 | 51.66,60.4 IC2.38 51.51,60.25 51.51,58.88 47.7,58.88 | 58.22,55.37 IC2.5 | 52.43,48.82 IC2.17 52.27,48.97 52.27,53.7 | 44.81,59.64 47.09,59.64 47.7,59.03 47.7,58.88 | 44.81,59.64 39.17,59.64 REF0.1 | 47.7,53.85 47.7,58.88 | 52.27,53.7 47.7,53.7 47.7,53.85 | IC2.5 58.06,55.52 54.25,55.52 52.43,53.7 52.27,53.7 | v65.84,42.11 65.84,42.27 | 65.07,63.91 72.24,63.91 73,64.67 R2.2 | 65.07,63.91 38.4,63.91 37.64,64.67 REF1.1 | 65.15,76.94 65.07,76.86 65.07,63.91 | 65.15,76.94 65.68,77.47 67.67,77.47 68.88,76.25 JP3.2 | 65.15,76.94 65.07,77.01 58.22,77.01 54.41,73.2 46.18,73.2 46.02,73.05 CH2.4 45.87,73.05 44.81,74.12 36.73,74.12 36.42,74.42 32.61,74.42 31.39,73.2 25.76,73.2 CH1.4 25.6,72.9 22.55,72.9 20.42,70.76 LCD.VDD 20.27,70.76 16.61,74.42 12.19,74.42 10.82,73.05 5.49,73.05 CH0.4 | v44.81,59.79 44.81,59.64
VIN
  Top 0.356: SPEDC-DC.VIN 70.26,27.94 70.71,28.4 70.71,84.63 70.26,85.09 PWR.2
VUSB
  Top 0.152: 95.4,62.69 95.4,61.47 97.99,58.88 C5.2 98.15,58.73 98.91,57.96 98.91,54.61 98.15,53.85 C6.1 97.99,53.7 97.99,51.11 93.42,51.11 88.39,56.13 88.39,58.11 86.87,58.11 IC3.4 | 95.4,62.69 95.4,70.61 93.12,72.9 RUSB3.1 | 95.4,62.69 93.12,60.4 93.12,54.92 94.03,54.92 IC3.20

## Text on the board
tPlace: D+ D- 5V | Gnd Gnd NC Vbatt | OSPL V 2.4.4 | 2015-01-14 | Dr Zengqiang Liu | ST. CLOUD MN USA | CC-BY-SA